# EAGLE board micromouse (EAGLE 9.0.1)

Size 100 x 80 mm. Coordinates in mm from the lower left corner, seen from the top.
Outline: 0,0 100,0 100,80 0,80 0,0
Copper layers (1*16): Top 0.035mm / dielectric 1.5mm / Bottom 0.035mm
Design rules "default": minimum track width 6mil, minimum drill 0.35mm, track to track 6mil, track to pad 6mil, pad to pad 6mil, via to via 6mil, smd to smd 6mil, copper to edge 40mil, drill to drill 6mil, minimum pad ring 10mil, minimum via ring 8mil, stop-mask expansion 4mil, vias tented up to drill 0mil, thermal gap 10mil

## Footprints (pad centres in the part's own frame; a part is rotated, then mirrored left to right if it is on the bottom)
C2.5-3 = drill 0.813 pad 1.6 octagon: 1 -1.27,0; 2 1.27,0
0204/5 = drill 0.813 octagon: 1 -2.54,0; 2 2.54,0
TEENSY3.2 = drill 0.6 square: 0 -3.81,6.35; 1 -3.81,5.08; 2 -3.81,3.81; 3 -3.81,2.54; 4 -3.81,1.27; 5 -3.81,0; 6 -3.81,-1.27; 7 -3.81,-2.54; 8 -3.81,-3.81; 9 -3.81,-5.08; 10 -3.81,-6.35; 11 -3.81,-7.62; 12 -3.81,-8.89; 13 3.81,-8.89; 14 3.81,-7.62; 15 3.81,-6.35; 16 3.81,-5.08; 17 3.81,-3.81; 18 3.81,-2.54; 19 3.81,-1.27; 20 3.81,0; 21 3.81,1.27; 22 3.81,2.54; 23 3.81,3.81; 24 3.81,5.08; 25 3.81,6.35; 26 3.81,7.62; GND -3.81,7.62
MOTOR_DRIVER = drill 0.6 square: L_5V -3.81,-3.81; L_GND_1 -3.81,1.27; L_GND_2 -3.81,0; L_M1_1 -3.81,2.54; L_M1_2 -3.81,-1.27; M1_ENABLE -3.81,5.08; M1_FWD_PWN -3.81,3.81; M1_REV_PWN -3.81,-2.54; M2_ENABLE 3.81,-3.81; M2_FWD_PWN 3.81,-2.54; M2_REV_PWM 3.81,3.81; R_5V 3.81,5.08; R_GND_1 3.81,1.27; R_GND_2 3.81,0; R_M2_1 3.81,2.54; R_M2_2 3.81,-1.27
IR_RECIEVER = drill 0.6 square: P$1 -1.27,0; P$2 0,0
IR_EMITTER = drill 0.6 square: 1 -1.27,0; 2 0,0
MOTOR_ENCODER = drill 0.6 square: P$1 -1.27,2.54; P$2 -1.27,1.27; P$3 -1.27,0; P$4 -1.27,-1.27; P$5 -1.27,-2.54; P$6 -1.27,-3.81

## Placement (x,y rotation side)
C1  [C2.5-3]  24.13,36.83 0 top
R1  10k  [0204/5]  86.36,54.61 0 top
R2  10k  [0204/5]  86.36,68.58 0 top
R3  10k  [0204/5]  13.97,54.61 0 top
R4  10k  [0204/5]  21.59,66.04 0 top
R5  10k  [0204/5]  57.15,69.85 0 top
R6  330  [0204/5]  46.99,71.12 0 top
R7  330  [0204/5]  21.59,71.12 0 top
R8  330  [0204/5]  86.36,72.39 0 top
R9  330  [0204/5]  13.97,59.69 0 top
R10  330  [0204/5]  86.36,59.69 0 top
U$1  TEENSY3.2  [TEENSY3.2]  45.72,34.29 0 top
U$2  MOTOR_DRIVER  [MOTOR_DRIVER]  45.72,11.43 0 top
U$3  IR_RECIEVER  [IR_RECIEVER]  6.35,55.88 0 top
U$4  IR_RECIEVER  [IR_RECIEVER]  97.79,54.61 0 top
U$5  IR_RECIEVER  [IR_RECIEVER]  96.52,68.58 0 top
U$6  IR_RECIEVER  [IR_RECIEVER]  6.35,68.58 0 top
U$7  IR_RECIEVER  [IR_RECIEVER]  57.15,76.2 0 top
U$8  IR_EMITTER  [IR_EMITTER]  46.99,76.2 0 top
U$9  IR_EMITTER  [IR_EMITTER]  6.35,72.39 0 top
U$10  IR_EMITTER  [IR_EMITTER]  96.52,72.39 0 top
U$11  IR_EMITTER  [IR_EMITTER]  6.35,59.69 0 top
U$12  IR_EMITTER  [IR_EMITTER]  97.79,59.69 0 top
U$13  MOTOR_ENCODER  [MOTOR_ENCODER]  17.78,17.78 0 top
U$14  MOTOR_ENCODER  [MOTOR_ENCODER]  78.74,20.32 0 top

## Library data of the parts
C1 = capacitor-wima
R1-R10 = rcl; SPICEPREFIX: R
U$1 = teensy_3.2
U$2 = motor_driver
U$3-U$7 = IR_RECIEVER
U$8-U$12 = IR_EMITTER
U$13 U$14 = MOTOR_ENCODER

## Nets
GND: C1.2 R1.1 R2.2 R3.1 R4.1 R5.2 U$1.GND U$2.L_GND_1 U$2.L_GND_2 U$2.R_GND_1 U$2.R_GND_2 U$8.2 U$9.2 U$10.2 U$11.2 U$12.2 U$13.P$1 U$14.P$1
N$1: U$1.2 U$2.M1_ENABLE
N$2: U$1.3 U$2.M1_FWD_PWN
N$3: U$2.L_M1_2 U$13.P$3
N$4: U$1.1 U$2.M2_ENABLE
N$5: U$1.5 U$2.M2_REV_PWM
N$6: U$2.R_M2_2 U$14.P$3
N$7: U$1.6 U$2.M2_FWD_PWN
N$8: U$1.4 U$2.M1_REV_PWN
N$9: R6.2 U$8.1
N$10: R6.1 U$1.0
N$11: R7.1 U$9.1
N$12: R7.2 U$1.7
N$13: R8.1 U$10.1
N$14: R8.2 U$1.8
N$15: R9.1 U$11.1
N$16: R9.2 U$1.11
N$17: R10.1 U$12.1
N$18: R10.2 U$1.12
N$19: R1.2 U$1.15 U$4.P$2
N$20: R2.1 U$1.16 U$5.P$2
N$21: R4.2 U$1.17 U$6.P$2
N$22: R5.1 U$1.18 U$7.P$2
N$23: U$1.24 U$3.P$1 U$4.P$1 U$5.P$1 U$6.P$1 U$7.P$1
N$24: R3.2 U$1.14 U$3.P$2
N$25: U$2.L_M1_1 U$13.P$2
N$26: U$1.20 U$14.P$5
N$27: U$1.13 U$13.P$4
N$28: U$1.21 U$14.P$4
N$29: U$1.19 U$13.P$5
N$30: C1.1 U$1.26 U$2.L_5V U$2.R_5V U$13.P$6 U$14.P$6
N$32: U$2.R_M2_1 U$14.P$2

## Tracks (layer width: path | path; a pad name or v marks a point on that pad's centre or on a via)
GND  (17 unrouted)
N$1  (1 unrouted)
N$2  (1 unrouted)
N$3  (1 unrouted)
N$4  (1 unrouted)
N$5  (1 unrouted)
N$6  (1 unrouted)
N$7  (1 unrouted)
N$8  (1 unrouted)
N$9  (1 unrouted)
N$10  (1 unrouted)
N$11  (1 unrouted)
N$12  (1 unrouted)
N$13  (1 unrouted)
N$14  (1 unrouted)
N$15  (1 unrouted)
N$16  (1 unrouted)
N$17  (1 unrouted)
N$18  (1 unrouted)
N$19  (2 unrouted)
N$20  (2 unrouted)
N$21  (2 unrouted)
N$22  (2 unrouted)
N$23  (5 unrouted)
N$24  (2 unrouted)
N$25  (1 unrouted)
N$26  (1 unrouted)
N$27  (1 unrouted)
N$28  (1 unrouted)
N$29  (1 unrouted)
N$30  (5 unrouted)
N$32  (1 unrouted)